# Allegro board PMOD2BNCSIMPLE_v1_02.brd
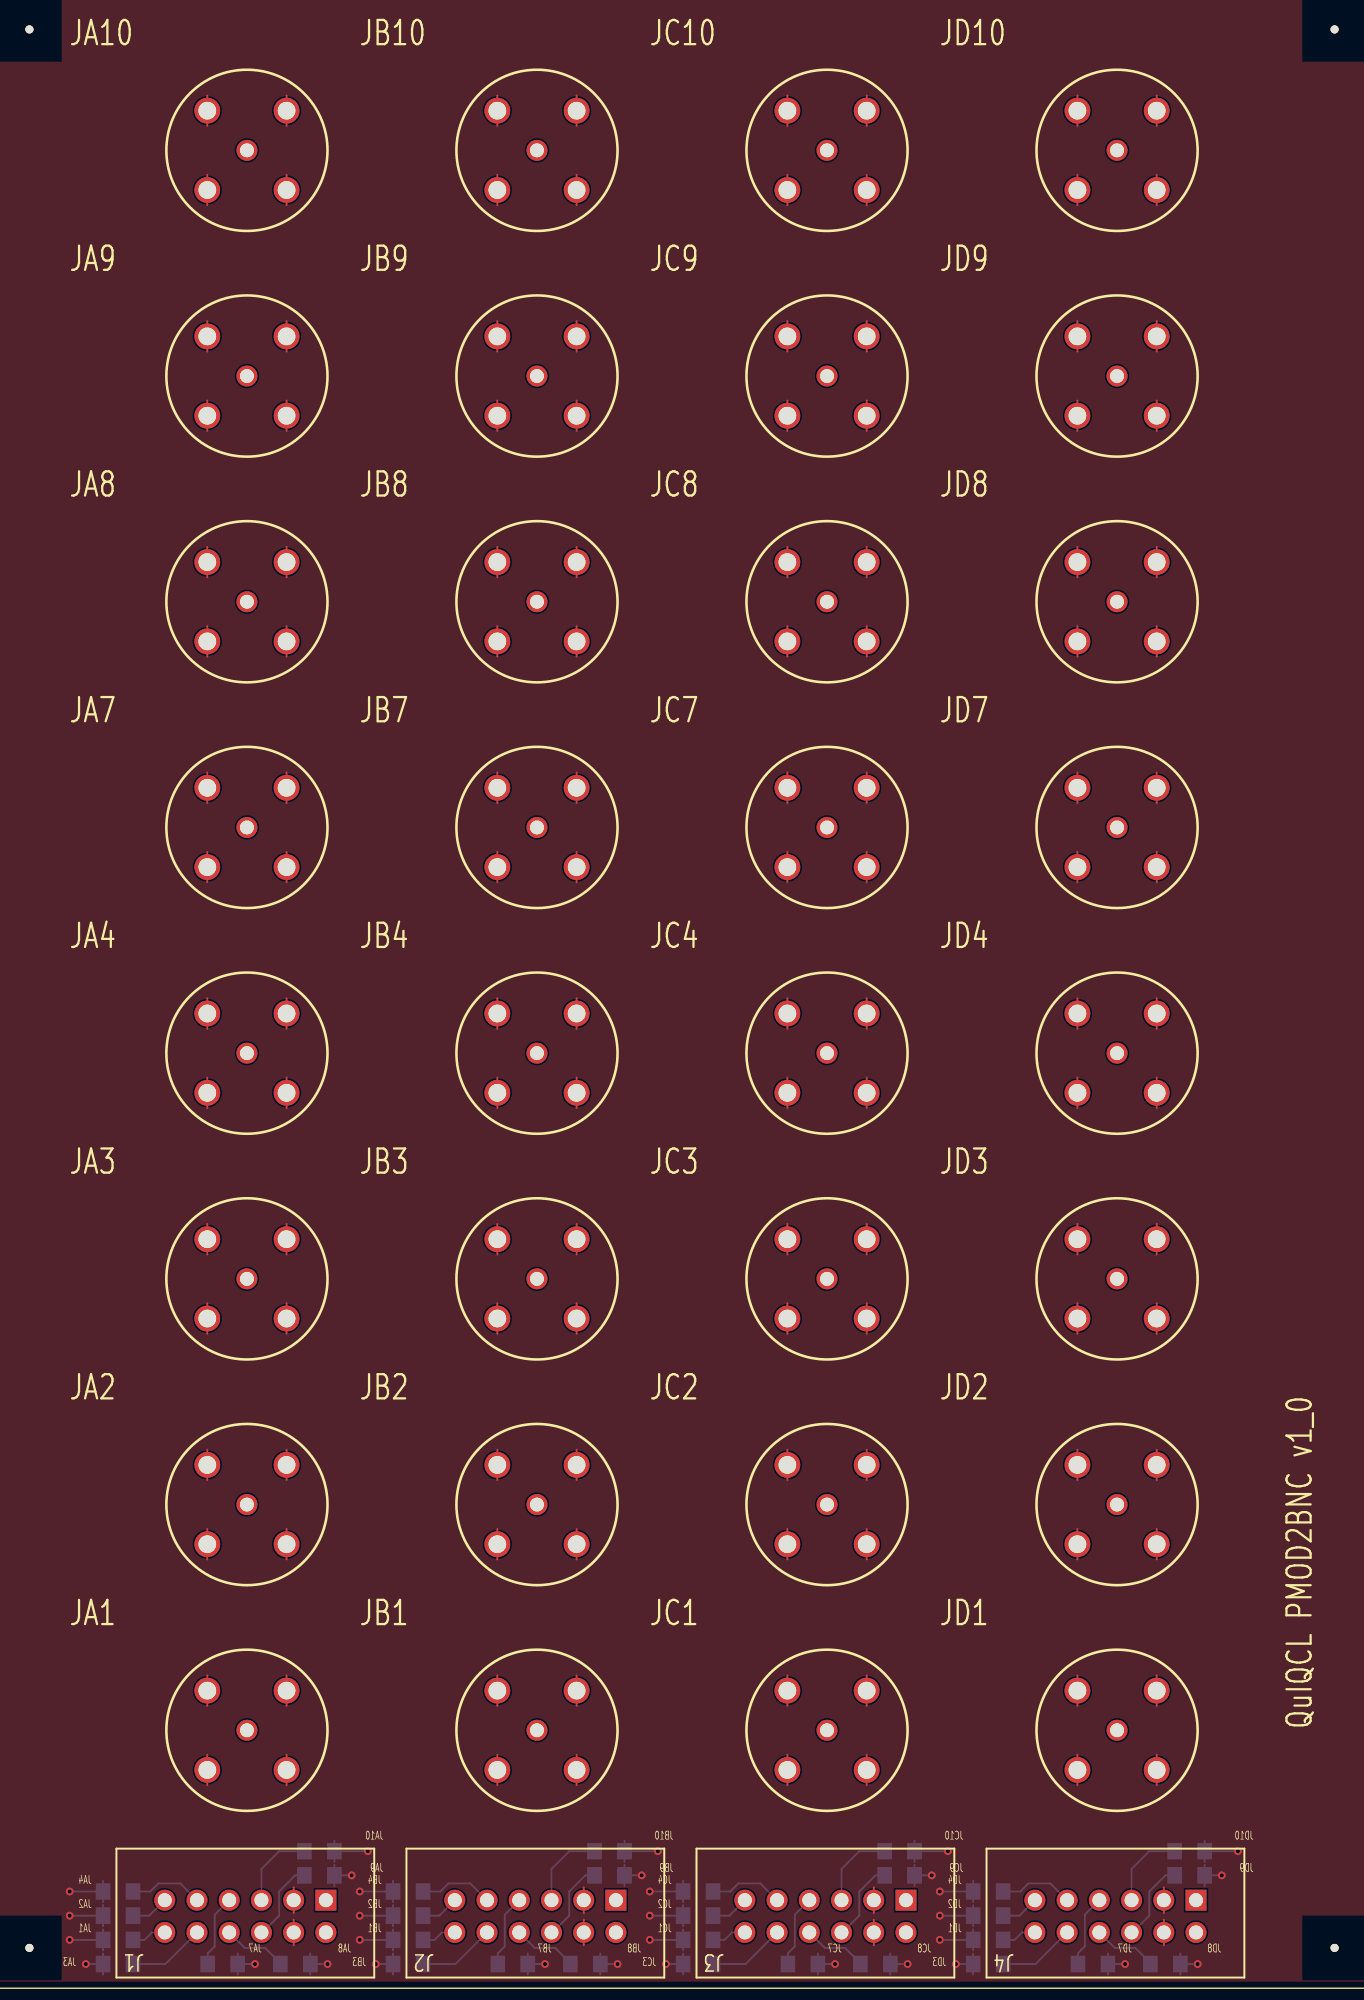
[diagram p0: board, top side]
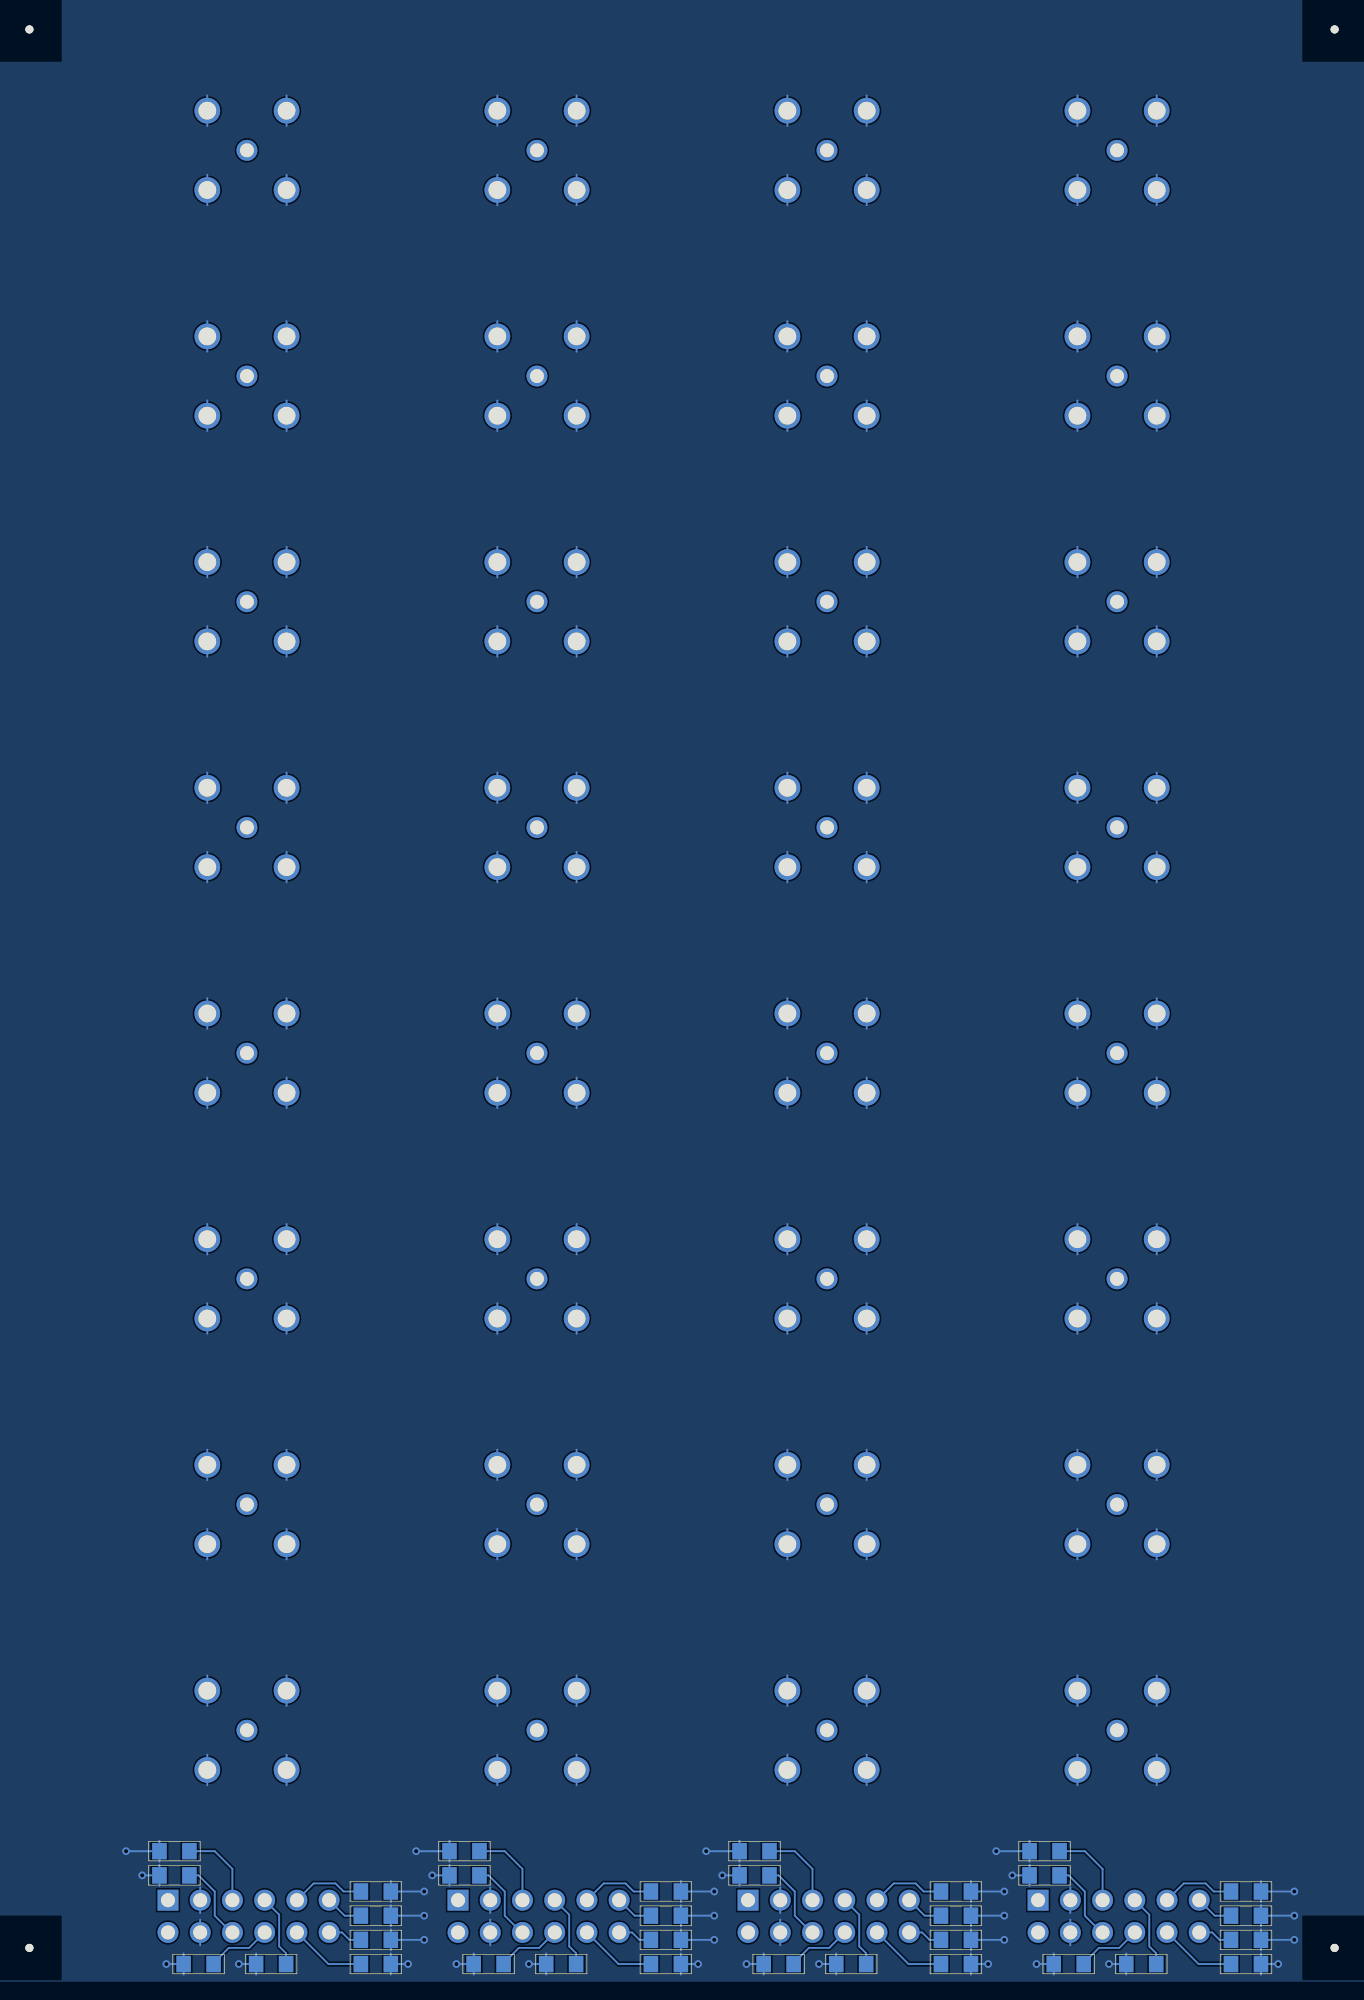
[diagram p1: board, bottom side, seen from below]

No outline. copper layers: TOP, SIGNAL, GND, BOTTOM. Coordinates in mm from the lowest, leftmost part position.

## Placement (name value [footprint] x y rotation side)
BNC1  -  [MP-13-22-1]  17.14 19.48 0 top
BNC2  -  [MP-13-22-1]  17.14 37.26 0 top
BNC3  -  [MP-13-22-1]  17.14 55.04 0 top
BNC4  -  [MP-13-22-1]  17.14 72.82 0 top
BNC5  -  [MP-13-22-1]  17.14 90.6 0 top
BNC6  -  [MP-13-22-1]  17.14 108.38 0 top
BNC7  -  [MP-13-22-1]  17.14 126.16 0 top
BNC8  -  [MP-13-22-1]  17.14 143.94 0 top
BNC9  -  [MP-13-22-1]  40.01 19.48 0 top
BNC10  -  [MP-13-22-1]  40.01 37.26 0 top
BNC11  -  [MP-13-22-1]  40.01 55.04 0 top
BNC12  -  [MP-13-22-1]  40.01 72.82 0 top
BNC13  -  [MP-13-22-1]  40.01 90.6 0 top
BNC14  -  [MP-13-22-1]  40.01 108.38 0 top
BNC15  -  [MP-13-22-1]  40.01 126.16 0 top
BNC16  -  [MP-13-22-1]  40.01 143.94 0 top
BNC17  -  [MP-13-22-1]  62.87 19.48 0 top
BNC18  -  [MP-13-22-1]  62.87 37.26 0 top
BNC19  -  [MP-13-22-1]  62.87 55.04 0 top
BNC20  -  [MP-13-22-1]  62.87 72.82 0 top
BNC21  -  [MP-13-22-1]  62.87 90.6 0 top
BNC22  -  [MP-13-22-1]  62.87 108.38 0 top
BNC23  -  [MP-13-22-1]  62.87 126.16 0 top
BNC24  -  [MP-13-22-1]  62.87 143.94 0 top
BNC25  -  [MP-13-22-1]  85.73 19.48 0 top
BNC26  -  [MP-13-22-1]  85.73 37.26 0 top
BNC27  -  [MP-13-22-1]  85.73 55.04 0 top
BNC28  -  [MP-13-22-1]  85.73 72.82 0 top
BNC29  -  [MP-13-22-1]  85.73 90.6 0 top
BNC30  -  [MP-13-22-1]  85.73 108.38 0 top
BNC31  -  [MP-13-22-1]  85.73 126.16 0 top
BNC32  -  [MP-13-22-1]  85.73 143.94 0 top
J1  71764_0114  [717640112]  6.86 0 180 top
J2  71764_0114  [717640112]  29.72 0 180 top
J3  71764_0114  [717640112]  52.58 0 180 top
J4  71764_0114  [717640112]  75.44 0 180 top
NOREF  -  [unnamed]  0 2.34 0 top
NOREF#2  -  [unnamed]  0 153.47 0 top
NOREF#3  -  [unnamed]  102.87 153.47 0 top
NOREF#4  -  [unnamed]  102.87 2.34 0 top
R1  -  [RES_0805]  6.99 2.97 180 bottom
R2  -  [RES_0805]  6.99 4.88 180 bottom
R3  -  [RES_0805]  6.99 1.07 180 bottom
R4  -  [RES_0805]  6.99 6.78 180 bottom
R5  -  [RES_0805]  15.24 1.07 0 bottom
R6  -  [RES_0805]  20.95 1.07 0 bottom
R7  -  [RES_0805]  22.86 8.05 0 bottom
R8  -  [RES_0805]  22.86 9.96 0 bottom
R9  -  [RES_0805]  29.85 2.97 180 bottom
R10  -  [RES_0805]  29.85 4.88 180 bottom
R11  -  [RES_0805]  29.85 1.07 180 bottom
R12  -  [RES_0805]  29.85 6.78 180 bottom
R13  -  [RES_0805]  38.1 1.07 0 bottom
R14  -  [RES_0805]  43.82 1.07 0 bottom
R15  -  [RES_0805]  45.72 8.05 0 bottom
R16  -  [RES_0805]  45.72 9.96 0 bottom
R17  -  [RES_0805]  52.71 2.97 180 bottom
R18  -  [RES_0805]  52.71 4.88 180 bottom
R19  -  [RES_0805]  52.71 1.07 180 bottom
R20  -  [RES_0805]  52.71 6.78 180 bottom
R21  -  [RES_0805]  60.96 1.07 0 bottom
R22  -  [RES_0805]  66.67 1.07 0 bottom
R23  -  [RES_0805]  68.58 8.05 0 bottom
R24  -  [RES_0805]  68.58 9.96 0 bottom
R25  -  [RES_0805]  75.56 2.97 180 bottom
R26  -  [RES_0805]  75.56 4.88 180 bottom
R27  -  [RES_0805]  75.56 1.07 180 bottom
R28  -  [RES_0805]  75.56 6.78 180 bottom
R29  -  [RES_0805]  83.82 1.07 0 bottom
R30  -  [RES_0805]  89.53 1.07 0 bottom
R31  -  [RES_0805]  91.44 8.05 0 bottom
R32  -  [RES_0805]  91.44 9.96 0 bottom

## Library data of the parts
BNC1-BNC32 = MP-13-22-1
J1-J4 = 71764_0114
R1-R32 = RES_0805

## Footprints (pads in the part's own frame, mm; a bottom-side part is the same pattern mirrored in y, then rotated)
717640112
  rect 1.651x1.651 hole 1.1: 1(-16.51,-6.096)
  round 1.651 hole 1.1: 2(-16.51,-3.556) 3(-13.97,-6.096) 4(-13.97,-3.556) 5(-11.43,-6.096) 6(-11.43,-3.556) 7(-8.89,-6.096) 8(-8.89,-3.556) 9(-6.35,-6.096) 10(-6.35,-3.556) 11(-3.81,-6.096) 12(-3.81,-3.556)
MP-13-22-1
  round 2.032 hole 1.397: 1(3.124,3.124) 2(3.124,-3.124) 3(-3.124,-3.124) 4(-3.124,3.124)
  round 1.651 hole 1.092: 5(0,0)
RES_0805
  rect 1.151x1.3 smd: 1(1.181,0) 2(-1.181,0)
unnamed
  round 0.635 hole 3.175 unplated: (0,0)

## Nets
GND: BNC1.1(GND1) BNC1.2(GND2) BNC1.3(GND3) BNC1.4(GND4) BNC2.1(GND1) BNC2.2(GND2) BNC2.3(GND3) BNC2.4(GND4) BNC3.1(GND1) BNC3.2(GND2) BNC3.3(GND3) BNC3.4(GND4) BNC4.1(GND1) BNC4.2(GND2) BNC4.3(GND3) BNC4.4(GND4) BNC5.1(GND1) BNC5.2(GND2) BNC5.3(GND3) BNC5.4(GND4) BNC6.1(GND1) BNC6.2(GND2) BNC6.3(GND3) BNC6.4(GND4) BNC7.1(GND1) BNC7.2(GND2) BNC7.3(GND3) BNC7.4(GND4) BNC8.1(GND1) BNC8.2(GND2) BNC8.3(GND3) BNC8.4(GND4) BNC9.1(GND1) BNC9.2(GND2) BNC9.3(GND3) BNC9.4(GND4) BNC10.1(GND1) BNC10.2(GND2) BNC10.3(GND3) BNC10.4(GND4) BNC11.1(GND1) BNC11.2(GND2) BNC11.3(GND3) BNC11.4(GND4) BNC12.1(GND1) BNC12.2(GND2) BNC12.3(GND3) BNC12.4(GND4) BNC13.1(GND1) BNC13.2(GND2) BNC13.3(GND3) BNC13.4(GND4) BNC14.1(GND1) BNC14.2(GND2) BNC14.3(GND3) BNC14.4(GND4) BNC15.1(GND1) BNC15.2(GND2) BNC15.3(GND3) BNC15.4(GND4) BNC16.1(GND1) BNC16.2(GND2) BNC16.3(GND3) BNC16.4(GND4) BNC17.1(GND1) BNC17.2(GND2) BNC17.3(GND3) BNC17.4(GND4) BNC18.1(GND1) BNC18.2(GND2) BNC18.3(GND3) BNC18.4(GND4) BNC19.1(GND1) BNC19.2(GND2) BNC19.3(GND3) BNC19.4(GND4) BNC20.1(GND1) BNC20.2(GND2) BNC20.3(GND3) BNC20.4(GND4) BNC21.1(GND1) BNC21.2(GND2) BNC21.3(GND3) BNC21.4(GND4) BNC22.1(GND1) BNC22.2(GND2) BNC22.3(GND3) BNC22.4(GND4) BNC23.1(GND1) BNC23.2(GND2) BNC23.3(GND3) BNC23.4(GND4) BNC24.1(GND1) BNC24.2(GND2) BNC24.3(GND3) BNC24.4(GND4) BNC25.1(GND1) BNC25.2(GND2) BNC25.3(GND3) BNC25.4(GND4) BNC26.1(GND1) BNC26.2(GND2) BNC26.3(GND3) BNC26.4(GND4) BNC27.1(GND1) BNC27.2(GND2) BNC27.3(GND3) BNC27.4(GND4) BNC28.1(GND1) BNC28.2(GND2) BNC28.3(GND3) BNC28.4(GND4) BNC29.1(GND1) BNC29.2(GND2) BNC29.3(GND3) BNC29.4(GND4) BNC30.1(GND1) BNC30.2(GND2) BNC30.3(GND3) BNC30.4(GND4) BNC31.1(GND1) BNC31.2(GND2) BNC31.3(GND3) BNC31.4(GND4) BNC32.1(GND1) BNC32.2(GND2) BNC32.3(GND3) BNC32.4(GND4) J1.3 J1.4 J2.3 J2.4 J3.3 J3.4 J4.3 J4.4 R1.1 R2.1 R3.1 R4.1 R5.1 R6.1 R7.1 R8.1 R9.1 R10.1 R11.1 R12.1 R13.1 R14.1 R15.1 R16.1 R17.1 R18.1 R19.1 R20.1 R21.1 R22.1 R23.1 R24.1 R25.1 R26.1 R27.1 R28.1 R29.1 R30.1 R31.1 R32.1
N08480: BNC1.5(IO) J1.12 R1.2
N08489: BNC2.5(IO) J1.10 R3.2
N08507: BNC3.5(IO) J1.7 R5.2
N08519: BNC4.5(IO) J1.6 R7.2
N08544: BNC5.5(IO) J1.11 R2.2
N08556: BNC6.5(IO) J1.9 R4.2
N08588: BNC7.5(IO) J1.8 R6.2
N08600: BNC8.5(IO) J1.5 R8.2
N13592: BNC9.5(IO) J2.12 R9.2
N13596: BNC10.5(IO) J2.10 R11.2
N13604: BNC11.5(IO) J2.7 R13.2
N13610: BNC12.5(IO) J2.6 R15.2
N13620: BNC13.5(IO) J2.11 R10.2
N13626: BNC14.5(IO) J2.9 R12.2
N13636: BNC15.5(IO) J2.8 R14.2
N13642: BNC16.5(IO) J2.5 R16.2
N14473: BNC17.5(IO) J3.12 R17.2
N14477: BNC18.5(IO) J3.10 R19.2
N14485: BNC19.5(IO) J3.7 R21.2
N14491: BNC20.5(IO) J3.6 R23.2
N14501: BNC21.5(IO) J3.11 R18.2
N14507: BNC22.5(IO) J3.9 R20.2
N14517: BNC23.5(IO) J3.8 R22.2
N14523: BNC24.5(IO) J3.5 R24.2
N15354: BNC25.5(IO) J4.12 R25.2
N15358: BNC26.5(IO) J4.10 R27.2
N15366: BNC27.5(IO) J4.7 R29.2
N15372: BNC28.5(IO) J4.6 R31.2
N15382: BNC29.5(IO) J4.11 R26.2
N15388: BNC30.5(IO) J4.9 R28.2
N15398: BNC31.5(IO) J4.8 R30.2
N15404: BNC32.5(IO) J4.5 R32.2

Pads without a net: J1 1 2; J2 1 2; J3 1 2; J4 1 2

## Via types
v1: diameter 0.61, hole 0.33, TOP to BOTTOM, 32 vias

## Routing (per net, layer and track width the routed paths; a pad name or vN(x,y) marks a point on that pad's centre or on a via; arc(x,y) is an arc through that point)
GND: length 1409.3
  TOP w0.127: 14.02,92.53 BNC5.4 14.02,94.92 ; 20.83,5.09 J1.3 20.83,7.1 ; 36.88,17.56 BNC9.3 36.88,15.16 ; 36.88,92.53 BNC13.4 36.88,94.92 ; 43.13,130.48 BNC15.1 43.13,128.09 ; 88.85,74.75 BNC28.1 88.85,77.14 ; 36.88,39.19 BNC10.4 36.88,41.58 ; 14.02,21.41 BNC1.4 14.02,23.8 ; 14.02,104.06 BNC6.3 14.02,106.46 ; 20.27,139.62 BNC8.2 20.27,142.02 ; 89.41,4.56 J4.4 89.41,2.55 ; 88.85,32.94 BNC26.2 88.85,35.34 ; 36.88,23.8 BNC9.4 36.88,21.41 ; 65.99,88.68 BNC21.2 65.99,86.28 ; 59.74,124.24 BNC23.3 59.74,121.84 ; 43.13,77.14 BNC12.1 43.13,74.75 ; 43.13,21.41 BNC9.1 43.13,23.8 ; 20.27,70.9 BNC4.2 20.27,68.5 ; 36.88,50.72 BNC11.3 36.88,53.12 ; 66.55,2.55 J3.4 66.55,4.56 ; 14.02,148.26 BNC8.4 14.02,145.87 ; 65.99,92.53 BNC21.1 65.99,94.92 ; 88.85,94.92 BNC29.1 88.85,92.53 ; 14.02,50.72 BNC3.3 14.02,53.12 ; 14.02,68.5 BNC4.3 14.02,70.9 ; 20.27,112.7 BNC6.1 20.27,110.31 ; 59.74,70.9 BNC20.3 59.74,68.5 ; 65.99,128.09 BNC23.1 65.99,130.48 ; 20.27,106.46 BNC6.2 20.27,104.06 ; 20.27,145.87 BNC8.1 20.27,148.26 ; 59.74,148.26 BNC24.4 59.74,145.87 ; 82.6,145.87 BNC32.4 82.6,148.26 ; 36.88,86.28 BNC13.3 36.88,88.68 ; 43.13,145.87 BNC16.1 43.13,148.26 ; 88.85,70.9 BNC28.2 88.85,68.5 ; 20.27,121.84 BNC7.2 20.27,124.24 ; 14.02,130.48 BNC7.4 14.02,128.09 ; 82.6,112.7 BNC30.4 82.6,110.31 ; 20.27,17.56 BNC1.2 20.27,15.16 ; 14.02,88.68 BNC5.3 14.02,86.28 ; 36.88,104.06 BNC14.3 36.88,106.46 ; 14.02,15.16 BNC1.3 14.02,17.56 ; 88.85,56.97 BNC27.1 88.85,59.36 ; 43.13,50.72 BNC11.2 43.13,53.12 ; 36.88,139.62 BNC16.3 36.88,142.02 ; 20.27,21.41 BNC1.1 20.27,23.8 ; 14.02,35.34 BNC2.3 14.02,32.94 ; 65.99,53.12 BNC19.2 65.99,50.72 ; 59.74,35.34 BNC18.3 59.74,32.94 ; 82.6,104.06 BNC30.3 82.6,106.46 ; 89.41,5.09 J4.3 89.41,7.1 ; 82.6,88.68 BNC29.3 82.6,86.28 ; 65.99,121.84 BNC23.2 65.99,124.24 ; 36.88,110.31 BNC14.4 36.88,112.7 ; 59.74,50.72 BNC19.3 59.74,53.12 ; 59.74,104.06 BNC22.3 59.74,106.46 ; 14.02,142.02 BNC8.3 14.02,139.62 ; 43.69,2.55 J2.4 43.69,4.56 ; 36.88,77.14 BNC12.4 36.88,74.75 ; 43.69,7.1 J2.3 43.69,5.09 ; 20.27,94.92 BNC5.1 20.27,92.53 ; 82.6,70.9 BNC28.3 82.6,68.5 ; 36.88,124.24 BNC15.3 36.88,121.84 ; 43.13,112.7 BNC14.1 43.13,110.31 ; 88.85,139.62 BNC32.2 88.85,142.02 ; 65.99,23.8 BNC17.1 65.99,21.41 ; 59.74,142.02 BNC24.3 59.74,139.62 ; 88.85,17.56 BNC25.2 88.85,15.16 ; 65.99,74.75 BNC20.1 65.99,77.14 ; 43.13,86.28 BNC13.2 43.13,88.68 ; 14.02,74.75 BNC4.4 14.02,77.14 ; 36.88,130.48 BNC15.4 36.88,128.09 ; 59.74,77.14 BNC20.4 59.74,74.75 ; 43.13,121.84 BNC15.2 43.13,124.24 ; 20.27,88.68 BNC5.2 20.27,86.28 ; 36.88,59.36 BNC11.4 36.88,56.97 ; 65.99,39.19 BNC18.1 65.99,41.58 ; 14.02,112.7 BNC6.4 14.02,110.31 ; 88.85,23.8 BNC25.1 88.85,21.41 ; 82.6,142.02 BNC32.3 82.6,139.62 ; 20.27,32.94 BNC2.2 20.27,35.34 ; 20.27,56.97 BNC3.1 20.27,59.36 ; 43.13,32.94 BNC10.2 43.13,35.34 ; 43.13,17.56 BNC9.2 43.13,15.16 ; 82.6,128.09 BNC31.4 82.6,130.48 ; 82.6,121.84 BNC31.3 82.6,124.24 ; 59.74,112.7 BNC22.4 59.74,110.31 ; 20.27,39.19 BNC2.1 20.27,41.58 ; 88.85,145.87 BNC32.1 88.85,148.26 ; 14.02,121.84 BNC7.3 14.02,124.24 ; 59.74,59.36 BNC19.4 59.74,56.97 ; 82.6,53.12 BNC27.3 82.6,50.72 ; 88.85,106.46 BNC30.2 88.85,104.06 ; 14.02,56.97 BNC3.4 14.02,59.36 ; 82.6,15.16 BNC25.3 82.6,17.56 ; 88.85,124.24 BNC31.2 88.85,121.84 ; 88.85,50.72 BNC27.2 88.85,53.12 ; 88.85,41.58 BNC26.1 88.85,39.19 ; 36.88,148.26 BNC16.4 36.88,145.87 ; 43.13,70.9 BNC12.2 43.13,68.5 ; 59.74,41.58 BNC18.4 59.74,39.19 ; 82.6,39.19 BNC26.4 82.6,41.58 ; 59.74,15.16 BNC17.3 59.74,17.56 ; 65.99,148.26 BNC24.1 65.99,145.87 ; 65.99,35.34 BNC18.2 65.99,32.94 ; 59.74,92.53 BNC21.4 59.74,94.92 ; 20.27,53.12 BNC3.2 20.27,50.72 ; 65.99,110.31 BNC22.1 65.99,112.7 ; 14.02,39.19 BNC2.4 14.02,41.58 ; 43.13,142.02 BNC16.2 43.13,139.62 ; 20.27,128.09 BNC7.1 20.27,130.48 ; 65.99,139.62 BNC24.2 65.99,142.02 ; 65.99,70.9 BNC20.2 65.99,68.5 ; 82.6,35.34 BNC26.3 82.6,32.94 ; 43.13,59.36 BNC11.1 43.13,56.97 ; 65.99,106.46 BNC22.2 65.99,104.06 ; 82.6,21.41 BNC25.4 82.6,23.8 ; 36.88,70.9 BNC12.3 36.88,68.5 ; 43.13,41.58 BNC10.1 43.13,39.19 ; 43.13,94.92 BNC13.1 43.13,92.53 ; 88.85,130.48 BNC31.1 88.85,128.09 ; 20.83,4.56 J1.4 20.83,2.55 ; 82.6,74.75 BNC28.4 82.6,77.14 ; 20.27,74.75 BNC4.1 20.27,77.14 ; 88.85,112.7 BNC30.1 88.85,110.31 ; 59.74,86.28 BNC21.3 59.74,88.68 ; 65.99,56.97 BNC19.1 65.99,59.36 ; 43.13,104.06 BNC14.2 43.13,106.46 ; 82.6,92.53 BNC29.4 82.6,94.92 ; 65.99,17.56 BNC17.2 65.99,15.16 ; 66.55,7.1 J3.3 66.55,5.09 ; 82.6,59.36 BNC27.4 82.6,56.97 ; 59.74,23.8 BNC17.4 59.74,21.41 ; 36.88,32.94 BNC10.3 36.88,35.34 ; 59.74,130.48 BNC23.4 59.74,128.09 ; 88.85,86.28 BNC29.2 88.85,88.68
  SIGNAL w0.112: 36.88,104.06 BNC14.3 36.88,106.46 ; 82.6,41.58 BNC26.4 82.6,39.19 ; 82.6,124.24 BNC31.3 82.6,121.84 ; 59.74,56.97 BNC19.4 59.74,59.36 ; 20.27,53.12 BNC3.2 20.27,50.72 ; 20.27,106.46 BNC6.2 20.27,104.06 ; 65.99,112.7 BNC22.1 65.99,110.31 ; 59.74,23.8 BNC17.4 59.74,21.41 ; 14.02,130.48 BNC7.4 14.02,128.09 ; 14.02,15.16 BNC1.3 14.02,17.56 ; 82.6,74.75 BNC28.4 82.6,77.14 ; 36.88,70.9 BNC12.3 36.88,68.5 ; 14.02,23.8 BNC1.4 14.02,21.41 ; 66.55,4.56 J3.4 66.55,2.55 ; 88.85,86.28 BNC29.2 88.85,88.68 ; 14.02,39.19 BNC2.4 14.02,41.58 ; 59.74,77.14 BNC20.4 59.74,74.75 ; 14.02,50.72 BNC3.3 14.02,53.12 ; 88.85,145.87 BNC32.1 88.85,148.26 ; 43.13,39.19 BNC10.1 43.13,41.58 ; 43.13,110.31 BNC14.1 43.13,112.7 ; 20.27,128.09 BNC7.1 20.27,130.48 ; 36.88,74.75 BNC12.4 36.88,77.14 ; 14.02,139.62 BNC8.3 14.02,142.02 ; 82.6,94.92 BNC29.4 82.6,92.53 ; 66.55,7.1 J3.3 66.55,5.09 ; 59.74,86.28 BNC21.3 59.74,88.68 ; 43.13,94.92 BNC13.1 43.13,92.53 ; 82.6,106.46 BNC30.3 82.6,104.06 ; 36.88,50.72 BNC11.3 36.88,53.12 ; 88.85,23.8 BNC25.1 88.85,21.41 ; 88.85,124.24 BNC31.2 88.85,121.84 ; 65.99,23.8 BNC17.1 65.99,21.41 ; 36.88,112.7 BNC14.4 36.88,110.31 ; 59.74,17.56 BNC17.3 59.74,15.16 ; 65.99,148.26 BNC24.1 65.99,145.87 ; 88.85,112.7 BNC30.1 88.85,110.31 ; 82.6,32.94 BNC26.3 82.6,35.34 ; 36.88,124.24 BNC15.3 36.88,121.84 ; 14.02,32.94 BNC2.3 14.02,35.34 ; 43.13,15.16 BNC9.2 43.13,17.56 ; 43.13,77.14 BNC12.1 43.13,74.75 ; 65.99,124.24 BNC23.2 65.99,121.84 ; 20.27,110.31 BNC6.1 20.27,112.7 ; 88.85,104.06 BNC30.2 88.85,106.46 ; 88.85,53.12 BNC27.2 88.85,50.72 ; 59.74,142.02 BNC24.3 59.74,139.62 ; 43.13,130.48 BNC15.1 43.13,128.09 ; 65.99,50.72 BNC19.2 65.99,53.12 ; 82.6,112.7 BNC30.4 82.6,110.31 ; 20.27,77.14 BNC4.1 20.27,74.75 ; 65.99,74.75 BNC20.1 65.99,77.14 ; 43.13,50.72 BNC11.2 43.13,53.12 ; 82.6,70.9 BNC28.3 82.6,68.5 ; 14.02,77.14 BNC4.4 14.02,74.75 ; 65.99,56.97 BNC19.1 65.99,59.36 ; 43.69,4.56 J2.4 43.69,2.55 ; 36.88,39.19 BNC10.4 36.88,41.58 ; 20.27,32.94 BNC2.2 20.27,35.34 ; 36.88,15.16 BNC9.3 36.88,17.56 ; 20.27,15.16 BNC1.2 20.27,17.56 ; 82.6,148.26 BNC32.4 82.6,145.87 ; 14.02,59.36 BNC3.4 14.02,56.97 ; 36.88,142.02 BNC16.3 36.88,139.62 ; 14.02,148.26 BNC8.4 14.02,145.87 ; 36.88,32.94 BNC10.3 36.88,35.34 ; 43.13,86.28 BNC13.2 43.13,88.68 ; 59.74,35.34 BNC18.3 59.74,32.94 ; 43.13,139.62 BNC16.2 43.13,142.02 ; 65.99,142.02 BNC24.2 65.99,139.62 ; 43.69,5.09 J2.3 43.69,7.1 ; 89.41,2.55 J4.4 89.41,4.56 ; 43.13,145.87 BNC16.1 43.13,148.26 ; 59.74,121.84 BNC23.3 59.74,124.24 ; 14.02,106.46 BNC6.3 14.02,104.06 ; 82.6,59.36 BNC27.4 82.6,56.97 ; 82.6,15.16 BNC25.3 82.6,17.56 ; 43.13,121.84 BNC15.2 43.13,124.24 ; 88.85,56.97 BNC27.1 88.85,59.36 ; 82.6,86.28 BNC29.3 82.6,88.68 ; 65.99,104.06 BNC22.2 65.99,106.46 ; 20.27,59.36 BNC3.1 20.27,56.97 ; 20.83,7.1 J1.3 20.83,5.09 ; 82.6,139.62 BNC32.3 82.6,142.02 ; 36.88,92.53 BNC13.4 36.88,94.92 ; 88.85,139.62 BNC32.2 88.85,142.02 ; 65.99,70.9 BNC20.2 65.99,68.5 ; 82.6,23.8 BNC25.4 82.6,21.41 ; 88.85,15.16 BNC25.2 88.85,17.56 ; 59.74,112.7 BNC22.4 59.74,110.31 ; 14.02,88.68 BNC5.3 14.02,86.28 ; 65.99,35.34 BNC18.2 65.99,32.94 ; 20.27,145.87 BNC8.1 20.27,148.26 ; 20.83,2.55 J1.4 20.83,4.56 ; 20.27,23.8 BNC1.1 20.27,21.41 ; 89.41,5.09 J4.3 89.41,7.1 ; 65.99,94.92 BNC21.1 65.99,92.53 ; 59.74,50.72 BNC19.3 59.74,53.12 ; 65.99,41.58 BNC18.1 65.99,39.19 ; 43.13,59.36 BNC11.1 43.13,56.97 ; 36.88,145.87 BNC16.4 36.88,148.26 ; 59.74,145.87 BNC24.4 59.74,148.26 ; 88.85,77.14 BNC28.1 88.85,74.75 ; 65.99,15.16 BNC17.2 65.99,17.56 ; 20.27,70.9 BNC4.2 20.27,68.5 ; 88.85,39.19 BNC26.1 88.85,41.58 ; 14.02,110.31 BNC6.4 14.02,112.7 ; 14.02,121.84 BNC7.3 14.02,124.24 ; 59.74,106.46 BNC22.3 59.74,104.06 ; 36.88,59.36 BNC11.4 36.88,56.97 ; 88.85,130.48 BNC31.1 88.85,128.09 ; 20.27,86.28 BNC5.2 20.27,88.68 ; 88.85,70.9 BNC28.2 88.85,68.5 ; 20.27,121.84 BNC7.2 20.27,124.24 ; 59.74,94.92 BNC21.4 59.74,92.53 ; 14.02,70.9 BNC4.3 14.02,68.5 ; 43.13,32.94 BNC10.2 43.13,35.34 ; 65.99,86.28 BNC21.2 65.99,88.68 ; 43.13,23.8 BNC9.1 43.13,21.41 ; 65.99,130.48 BNC23.1 65.99,128.09 ; 82.6,53.12 BNC27.3 82.6,50.72 ; 20.27,41.58 BNC2.1 20.27,39.19 ; 20.27,94.92 BNC5.1 20.27,92.53 ; 88.85,35.34 BNC26.2 88.85,32.94 ; 36.88,128.09 BNC15.4 36.88,130.48 ; 36.88,86.28 BNC13.3 36.88,88.68 ; 59.74,39.19 BNC18.4 59.74,41.58 ; 59.74,130.48 BNC23.4 59.74,128.09 ; 88.85,92.53 BNC29.1 88.85,94.92 ; 43.13,106.46 BNC14.2 43.13,104.06 ; 82.6,128.09 BNC31.4 82.6,130.48 ; 59.74,68.5 BNC20.3 59.74,70.9 ; 43.13,70.9 BNC12.2 43.13,68.5 ; 14.02,92.53 BNC5.4 14.02,94.92 ; 36.88,21.41 BNC9.4 36.88,23.8 ; 20.27,142.02 BNC8.2 20.27,139.62
  GND w0.127: 36.88,21.41 BNC9.4 36.88,23.8 ; 82.6,148.26 BNC32.4 82.6,145.87 ; 14.02,110.31 BNC6.4 14.02,112.7 ; 88.85,50.72 BNC27.2 88.85,53.12 ; 20.27,88.68 BNC5.2 20.27,86.28 ; 20.27,15.16 BNC1.2 20.27,17.56 ; 59.74,50.72 BNC19.3 59.74,53.12 ; 88.85,32.94 BNC26.2 88.85,35.34 ; 59.74,88.68 BNC21.3 59.74,86.28 ; 43.13,121.84 BNC15.2 43.13,124.24 ; 88.85,94.92 BNC29.1 88.85,92.53 ; 65.99,104.06 BNC22.2 65.99,106.46 ; 20.27,56.97 BNC3.1 20.27,59.36 ; 14.02,21.41 BNC1.4 14.02,23.8 ; 65.99,15.16 BNC17.2 65.99,17.56 ; 36.88,142.02 BNC16.3 36.88,139.62 ; 59.74,77.14 BNC20.4 59.74,74.75 ; 14.02,59.36 BNC3.4 14.02,56.97 ; 59.74,39.19 BNC18.4 59.74,41.58 ; 66.55,2.55 J3.4 66.55,4.56 ; 43.69,2.55 J2.4 43.69,4.56 ; 82.6,50.72 BNC27.3 82.6,53.12 ; 65.99,139.62 BNC24.2 65.99,142.02 ; 59.74,121.84 BNC23.3 59.74,124.24 ; 65.99,128.09 BNC23.1 65.99,130.48 ; 65.99,124.24 BNC23.2 65.99,121.84 ; 89.41,2.55 J4.4 89.41,4.56 ; 88.85,59.36 BNC27.1 88.85,56.97 ; 88.85,41.58 BNC26.1 88.85,39.19 ; 14.02,53.12 BNC3.3 14.02,50.72 ; 43.13,77.14 BNC12.1 43.13,74.75 ; 43.13,112.7 BNC14.1 43.13,110.31 ; 43.13,148.26 BNC16.1 43.13,145.87 ; 66.55,7.1 J3.3 66.55,5.09 ; 82.6,121.84 BNC31.3 82.6,124.24 ; 36.88,53.12 BNC11.3 36.88,50.72 ; 43.13,53.12 BNC11.2 43.13,50.72 ; 88.85,130.48 BNC31.1 88.85,128.09 ; 82.6,23.8 BNC25.4 82.6,21.41 ; 65.99,39.19 BNC18.1 65.99,41.58 ; 36.88,68.5 BNC12.3 36.88,70.9 ; 20.27,21.41 BNC1.1 20.27,23.8 ; 59.74,128.09 BNC23.4 59.74,130.48 ; 14.02,41.58 BNC2.4 14.02,39.19 ; 65.99,92.53 BNC21.1 65.99,94.92 ; 36.88,124.24 BNC15.3 36.88,121.84 ; 82.6,112.7 BNC30.4 82.6,110.31 ; 82.6,142.02 BNC32.3 82.6,139.62 ; 36.88,112.7 BNC14.4 36.88,110.31 ; 88.85,124.24 BNC31.2 88.85,121.84 ; 20.27,39.19 BNC2.1 20.27,41.58 ; 88.85,148.26 BNC32.1 88.85,145.87 ; 88.85,104.06 BNC30.2 88.85,106.46 ; 14.02,17.56 BNC1.3 14.02,15.16 ; 89.41,5.09 J4.3 89.41,7.1 ; 20.27,53.12 BNC3.2 20.27,50.72 ; 59.74,106.46 BNC22.3 59.74,104.06 ; 20.27,70.9 BNC4.2 20.27,68.5 ; 43.13,104.06 BNC14.2 43.13,106.46 ; 36.88,59.36 BNC11.4 36.88,56.97 ; 82.6,94.92 BNC29.4 82.6,92.53 ; 14.02,128.09 BNC7.4 14.02,130.48 ; 14.02,104.06 BNC6.3 14.02,106.46 ; 65.99,32.94 BNC18.2 65.99,35.34 ; 20.27,35.34 BNC2.2 20.27,32.94 ; 36.88,32.94 BNC10.3 36.88,35.34 ; 36.88,15.16 BNC9.3 36.88,17.56 ; 65.99,77.14 BNC20.1 65.99,74.75 ; 20.27,92.53 BNC5.1 20.27,94.92 ; 65.99,148.26 BNC24.1 65.99,145.87 ; 65.99,21.41 BNC17.1 65.99,23.8 ; 14.02,35.34 BNC2.3 14.02,32.94 ; 20.83,4.56 J1.4 20.83,2.55 ; 43.69,7.1 J2.3 43.69,5.09 ; 14.02,86.28 BNC5.3 14.02,88.68 ; 36.88,128.09 BNC15.4 36.88,130.48 ; 88.85,86.28 BNC29.2 88.85,88.68 ; 43.13,17.56 BNC9.2 43.13,15.16 ; 82.6,88.68 BNC29.3 82.6,86.28 ; 43.13,86.28 BNC13.2 43.13,88.68 ; 82.6,74.75 BNC28.4 82.6,77.14 ; 88.85,112.7 BNC30.1 88.85,110.31 ; 20.27,142.02 BNC8.2 20.27,139.62 ; 88.85,142.02 BNC32.2 88.85,139.62 ; 20.27,112.7 BNC6.1 20.27,110.31 ; 88.85,15.16 BNC25.2 88.85,17.56 ; 65.99,59.36 BNC19.1 65.99,56.97 ; 59.74,15.16 BNC17.3 59.74,17.56 ; 88.85,74.75 BNC28.1 88.85,77.14 ; 59.74,142.02 BNC24.3 59.74,139.62 ; 82.6,41.58 BNC26.4 82.6,39.19 ; 36.88,145.87 BNC16.4 36.88,148.26 ; 43.13,139.62 BNC16.2 43.13,142.02 ; 43.13,41.58 BNC10.1 43.13,39.19 ; 43.13,130.48 BNC15.1 43.13,128.09 ; 82.6,70.9 BNC28.3 82.6,68.5 ; 20.27,124.24 BNC7.2 20.27,121.84 ; 20.27,148.26 BNC8.1 20.27,145.87 ; 82.6,130.48 BNC31.4 82.6,128.09 ; 14.02,145.87 BNC8.4 14.02,148.26 ; 82.6,17.56 BNC25.3 82.6,15.16 ; 82.6,59.36 BNC27.4 82.6,56.97 ; 43.13,21.41 BNC9.1 43.13,23.8 ; 65.99,68.5 BNC20.2 65.99,70.9 ; 36.88,39.19 BNC10.4 36.88,41.58 ; 14.02,139.62 BNC8.3 14.02,142.02 ; 36.88,104.06 BNC14.3 36.88,106.46 ; 36.88,92.53 BNC13.4 36.88,94.92 ; 65.99,88.68 BNC21.2 65.99,86.28 ; 14.02,74.75 BNC4.4 14.02,77.14 ; 43.13,59.36 BNC11.1 43.13,56.97 ; 43.13,35.34 BNC10.2 43.13,32.94 ; 36.88,74.75 BNC12.4 36.88,77.14 ; 59.74,94.92 BNC21.4 59.74,92.53 ; 20.27,104.06 BNC6.2 20.27,106.46 ; 88.85,70.9 BNC28.2 88.85,68.5 ; 20.27,130.48 BNC7.1 20.27,128.09 ; 14.02,68.5 BNC4.3 14.02,70.9 ; 59.74,70.9 BNC20.3 59.74,68.5 ; 88.85,23.8 BNC25.1 88.85,21.41 ; 65.99,53.12 BNC19.2 65.99,50.72 ; 82.6,104.06 BNC30.3 82.6,106.46 ; 82.6,32.94 BNC26.3 82.6,35.34 ; 36.88,86.28 BNC13.3 36.88,88.68 ; 59.74,21.41 BNC17.4 59.74,23.8 ; 65.99,110.31 BNC22.1 65.99,112.7 ; 20.83,7.1 J1.3 20.83,5.09 ; 59.74,32.94 BNC18.3 59.74,35.34 ; 14.02,121.84 BNC7.3 14.02,124.24 ; 14.02,94.92 BNC5.4 14.02,92.53 ; 43.13,92.53 BNC13.1 43.13,94.92 ; 59.74,148.26 BNC24.4 59.74,145.87 ; 59.74,56.97 BNC19.4 59.74,59.36 ; 20.27,74.75 BNC4.1 20.27,77.14 ; 43.13,68.5 BNC12.2 43.13,70.9 ; 59.74,110.31 BNC22.4 59.74,112.7
  BOTTOM w0.145: 65.99,39.19 BNC18.1 65.99,41.58 ; R26.1 74.38,5.71 ; R26.1 74.38,4.04 ; R26.1 v1(71.76,4.88) ; 88.85,106.46 BNC30.2 88.85,104.06 ; 36.88,92.53 BNC13.4 36.88,94.92 ; R24.1 v1(72.39,9.96) ; R24.1 69.76,10.79 ; R24.1 69.76,9.12 ; 59.74,21.41 BNC17.4 59.74,23.8 ; 14.02,77.14 BNC4.4 14.02,74.75 ; 89.41,4.56 J4.4 89.41,2.55 ; 74.38,1.07 v1(73.03,1.07) ; 74.38,1.07 74.38,1.9 ; 74.38,1.07 74.38,0.23 ; 43.13,86.28 BNC13.2 43.13,88.68 ; 82.6,53.12 BNC27.3 82.6,50.72 ; R15.1 v1(48.26,8.05) ; R15.1 46.9,8.88 ; R15.1 46.9,7.22 ; 88.85,124.24 BNC31.2 88.85,121.84 ; 59.74,145.87 BNC24.4 59.74,148.26 ; 43.13,142.02 BNC16.2 43.13,139.62 ; 82.6,41.58 BNC26.4 82.6,39.19 ; 20.27,86.28 BNC5.2 20.27,88.68 ; 14.02,70.9 BNC4.3 14.02,68.5 ; 88.85,92.53 BNC29.1 88.85,94.92 ; 82.6,130.48 BNC31.4 82.6,128.09 ; 88.85,59.36 BNC27.1 88.85,56.97 ; R1.1 v1(3.17,2.97) ; R1.1 5.8,3.8 ; R1.1 5.8,2.14 ; 20.83,7.1 J1.3 20.83,5.09 ; R7.1 24.04,8.88 ; R7.1 v1(25.4,8.05) ; R7.1 24.04,7.22 ; 20.27,56.97 BNC3.1 20.27,59.36 ; 43.13,35.34 BNC10.2 43.13,32.94 ; 43.69,7.1 J2.3 43.69,5.09 ; 36.88,128.09 BNC15.4 36.88,130.48 ; 82.6,17.56 BNC25.3 82.6,15.16 ; 20.27,23.8 BNC1.1 20.27,21.41 ; 20.83,2.55 J1.4 20.83,4.56 ; 59.74,41.58 BNC18.4 59.74,39.19 ; R8.1 v1(26.67,9.96) ; R8.1 24.04,9.12 ; R8.1 24.04,10.79 ; 65.99,128.09 BNC23.1 65.99,130.48 ; 51.52,1.07 v1(50.17,1.07) ; 51.52,1.07 51.52,1.9 ; 51.52,1.07 51.52,0.23 ; 82.6,110.31 BNC30.4 82.6,112.7 ; 88.85,74.75 BNC28.1 88.85,77.14 ; R16.1 v1(49.53,9.96) ; R16.1 46.9,9.12 ; R16.1 46.9,10.79 ; 82.6,104.06 BNC30.3 82.6,106.46 ; 14.02,32.94 BNC2.3 14.02,35.34 ; R17.1 51.52,3.8 ; R17.1 51.52,2.14 ; R17.1 v1(48.9,2.97) ; 65.99,74.75 BNC20.1 65.99,77.14 ; 14.02,41.58 BNC2.4 14.02,39.19 ; 5.8,5.95 R4.1 ; R4.1 v1(3.17,6.78) ; R4.1 5.8,7.61 ; 16.42,0.23 R5.1 ; R5.1 v1(17.78,1.07) ; R5.1 16.42,1.9 ; 43.13,148.26 BNC16.1 43.13,145.87 ; 59.74,124.24 BNC23.3 59.74,121.84 ; 82.6,94.92 BNC29.4 82.6,92.53 ; 36.88,74.75 BNC12.4 36.88,77.14 ; 51.52,5.95 R20.1 ; R20.1 51.52,7.61 ; R20.1 v1(48.9,6.78) ; 20.27,68.5 BNC4.2 20.27,70.9 ; 14.02,94.92 BNC5.4 14.02,92.53 ; 59.74,70.9 BNC20.3 59.74,68.5 ; 36.88,139.62 BNC16.3 36.88,142.02 ; 88.85,142.02 BNC32.2 88.85,139.62 ; 43.13,59.36 BNC11.1 43.13,56.97 ; 65.99,92.53 BNC21.1 65.99,94.92 ; 14.02,50.72 BNC3.3 14.02,53.12 ; R12.1 v1(26.04,6.78) ; R12.1 28.66,5.95 ; R12.1 28.66,7.61 ; 14.02,121.84 BNC7.3 14.02,124.24 ; R18.1 51.52,5.71 ; R18.1 51.52,4.04 ; R18.1 v1(48.9,4.88) ; 92.62,9.12 R32.1 ; R32.1 92.62,10.79 ; R32.1 v1(95.25,9.96) ; 59.74,32.94 BNC18.3 59.74,35.34 ; 43.13,23.8 BNC9.1 43.13,21.41 ; 20.27,139.62 BNC8.2 20.27,142.02 ; 88.85,148.26 BNC32.1 88.85,145.87 ; 59.74,15.16 BNC17.3 59.74,17.56 ; 66.55,2.55 J3.4 66.55,4.56 ; 88.85,86.28 BNC29.2 88.85,88.68 ; R22.1 v1(69.22,1.07) ; R22.1 67.86,0.23 ; R22.1 67.86,1.9 ; 43.13,15.16 BNC9.2 43.13,17.56 ; 82.6,145.87 BNC32.4 82.6,148.26 ; 82.6,70.9 BNC28.3 82.6,68.5 ; 14.02,130.48 BNC7.4 14.02,128.09 ; 5.8,4.04 R2.1 ; R2.1 v1(3.17,4.88) ; R2.1 5.8,5.71 ; 36.88,17.56 BNC9.3 36.88,15.16 ; 88.85,112.7 BNC30.1 88.85,110.31 ; 36.88,148.26 BNC16.4 36.88,145.87 ; 5.8,0.23 5.8,1.07 ; 5.8,1.07 5.8,1.9 ; 5.8,1.07 v1(4.45,1.07) ; R31.1 92.62,8.88 ; R31.1 v1(93.98,8.05) ; R31.1 92.62,7.22 ; 65.99,56.97 BNC19.1 65.99,59.36 ; R6.1 22.14,1.9 ; R6.1 22.14,0.23 ; R6.1 v1(23.5,1.07) ; R23.1 69.76,8.88 ; R23.1 v1(71.12,8.05) ; R23.1 69.76,7.22 ; 88.85,41.58 BNC26.1 88.85,39.19 ; 59.74,94.92 BNC21.4 59.74,92.53 ; 88.85,68.5 BNC28.2 88.85,70.9 ; 36.88,70.9 BNC12.3 36.88,68.5 ; 88.85,17.56 BNC25.2 88.85,15.16 ; R21.1 v1(63.5,1.07) ; R21.1 62.14,1.9 ; R21.1 62.14,0.23 ; 74.38,2.14 R25.1 ; R25.1 74.38,3.8 ; R25.1 v1(71.76,2.97) ; 14.02,21.41 BNC1.4 14.02,23.8 ; 20.27,41.58 BNC2.1 20.27,39.19 ; 36.88,112.7 BNC14.4 36.88,110.31 ; 14.02,112.7 BNC6.4 14.02,110.31 ; 65.99,23.8 BNC17.1 65.99,21.41 ; 59.74,106.46 BNC22.3 59.74,104.06 ; 14.02,86.28 BNC5.3 14.02,88.68 ; 65.99,32.94 BNC18.2 65.99,35.34 ; 43.13,130.48 BNC15.1 43.13,128.09 ; 82.6,124.24 BNC31.3 82.6,121.84 ; 89.41,5.09 J4.3 89.41,7.1 ; 14.02,56.97 BNC3.4 14.02,59.36 ; 43.13,70.9 BNC12.2 43.13,68.5 ; 36.88,56.97 BNC11.4 36.88,59.36 ; R9.1 28.66,3.8 ; R9.1 v1(26.04,2.97) ; R9.1 28.66,2.14 ; 14.02,104.06 BNC6.3 14.02,106.46 ; 20.27,148.26 BNC8.1 20.27,145.87 ; 14.02,15.16 BNC1.3 14.02,17.56 ; 82.6,139.62 BNC32.3 82.6,142.02 ; 82.6,35.34 BNC26.3 82.6,32.94 ; 43.13,106.46 BNC14.2 43.13,104.06 ; 28.66,0.23 28.66,1.07 ; 28.66,1.07 28.66,1.9 ; 28.66,1.07 v1(27.3,1.07) ; 65.99,53.12 BNC19.2 65.99,50.72 ; 20.27,53.12 BNC3.2 20.27,50.72 ; R13.1 39.28,1.9 ; R13.1 v1(40.64,1.07) ; R13.1 39.28,0.23 ; 20.27,35.34 BNC2.2 20.27,32.94 ; R14.1 v1(46.36,1.07) ; R14.1 45,0.23 ; R14.1 45,1.9 ; 65.99,86.28 BNC21.2 65.99,88.68 ; 36.88,106.46 BNC14.3 36.88,104.06 ; 66.55,7.1 J3.3 66.55,5.09 ; 43.13,94.92 BNC13.1 43.13,92.53 ; 36.88,50.72 BNC11.3 36.88,53.12 ; 82.6,56.97 BNC27.4 82.6,59.36 ; 82.6,74.75 BNC28.4 82.6,77.14 ; 14.02,148.26 BNC8.4 14.02,145.87 ; 88.85,32.94 BNC26.2 88.85,35.34 ; 20.27,15.16 BNC1.2 20.27,17.56 ; 59.74,110.31 BNC22.4 59.74,112.7 ; 88.85,128.09 BNC31.1 88.85,130.48 ; R28.1 74.38,7.61 ; R28.1 74.38,5.95 ; R28.1 v1(71.76,6.78) ; 36.88,23.8 BNC9.4 36.88,21.41 ; 43.13,77.14 BNC12.1 43.13,74.75 ; 36.88,32.94 BNC10.3 36.88,35.34 ; 65.99,17.56 BNC17.2 65.99,15.16 ; 59.74,139.62 BNC24.3 59.74,142.02 ; 65.99,68.5 BNC20.2 65.99,70.9 ; 28.66,4.04 R10.1 ; R10.1 28.66,5.71 ; R10.1 v1(26.04,4.88) ; 43.13,124.24 BNC15.2 43.13,121.84 ; 59.74,74.75 BNC20.4 59.74,77.14 ; 88.85,50.72 BNC27.2 88.85,53.12 ; 43.69,2.55 J2.4 43.69,4.56 ; 36.88,39.19 BNC10.4 36.88,41.58 ; 59.74,53.12 BNC19.3 59.74,50.72 ; 65.99,112.7 BNC22.1 65.99,110.31 ; 36.88,88.68 BNC13.3 36.88,86.28 ; R29.1 v1(86.36,1.07) ; R29.1 85,0.23 ; R29.1 85,1.9 ; 20.27,106.46 BNC6.2 20.27,104.06 ; 14.02,139.62 BNC8.3 14.02,142.02 ; 82.6,86.28 BNC29.3 82.6,88.68 ; 88.85,23.8 BNC25.1 88.85,21.41 ; 82.6,21.41 BNC25.4 82.6,23.8 ; 20.27,121.84 BNC7.2 20.27,124.24 ; R30.1 v1(92.08,1.07) ; R30.1 90.72,0.23 ; R30.1 90.72,1.9 ; 36.88,124.24 BNC15.3 36.88,121.84 ; 65.99,142.02 BNC24.2 65.99,139.62 ; 65.99,148.26 BNC24.1 65.99,145.87 ; 20.27,130.48 BNC7.1 20.27,128.09 ; 43.13,110.31 BNC14.1 43.13,112.7 ; 20.27,110.31 BNC6.1 20.27,112.7 ; 59.74,56.97 BNC19.4 59.74,59.36 ; 65.99,124.24 BNC23.2 65.99,121.84 ; 43.13,50.72 BNC11.2 43.13,53.12 ; 59.74,88.68 BNC21.3 59.74,86.28 ; 59.74,130.48 BNC23.4 59.74,128.09 ; 43.13,39.19 BNC10.1 43.13,41.58 ; 20.27,74.75 BNC4.1 20.27,77.14 ; 20.27,92.53 BNC5.1 20.27,94.92 ; 65.99,106.46 BNC22.2 65.99,104.06
N08480: length 152.8
  TOP w0.127: BNC1.5 17.02,19.48
  SIGNAL w0.112: BNC1.5 21.59,19.48 22.86,20.75 22.86,29.64 20.95,31.55 12.7,31.55 11.43,30.28 11.43,29.64 11.56,29.51 20.8,29.51 20.93,29.39 20.93,29.13 20.8,29.01 11.56,29.01 11.43,28.88 11.43,28.63 11.56,28.5 20.8,28.5 20.93,28.37 20.93,28.12 20.8,27.99 11.56,27.99 11.43,27.86 11.43,27.61 11.56,27.48 20.8,27.48 20.93,27.36 20.93,27.1 20.8,26.97 11.56,26.97 11.43,26.85 11.43,26.59 11.56,26.47 20.8,26.47 20.93,26.34 20.93,26.09 20.8,25.96 11.56,25.96 11.43,25.83 11.43,25.58 11.56,25.45 20.8,25.45 20.93,25.32 20.93,25.07 20.8,24.94 11.56,24.94 11.43,24.82 11.43,9.96 8.89,7.42 8.89,5.33 J1.12
  BOTTOM w0.145: J1.12 9.65,3.56 9.07,2.97 R1.2
N08489: length 156
  SIGNAL w0.112: J1.10 11.99,2.34 9.52,2.34 7.62,4.24 7.62,8.05 10.16,10.59 10.16,42.09 10.29,42.21 17.14,42.21 17.27,42.34 17.27,42.6 17.14,42.72 10.29,42.72 10.16,42.85 10.16,43.1 10.29,43.23 17.14,43.23 17.27,43.36 17.27,43.61 17.14,43.74 10.29,43.74 10.16,43.87 10.16,44.12 10.29,44.25 17.14,44.25 17.27,44.37 17.27,44.63 17.14,44.75 10.29,44.75 10.16,44.88 10.16,45.14 10.29,45.26 17.14,45.26 17.27,45.39 17.27,45.64 17.14,45.77 10.29,45.77 10.16,45.9 10.16,46.15 10.29,46.28 17.14,46.28 17.27,46.41 17.27,46.66 17.14,46.79 10.29,46.79 10.16,46.91 10.16,47.42 12.07,49.33 20.95,49.33 22.86,47.42 22.86,39.17 20.95,37.26 BNC2.5
  GND w0.127: BNC2.5 17.02,37.26
  BOTTOM w0.145: J1.10 10.72,1.07 R3.2
N08507: length 156
  SIGNAL w0.112: 17.02,55.04 BNC3.5 20.95,55.04 22.59,56.68 22.59,65.47 20.95,67.11 10.8,67.11 8.89,65.2 8.89,64.44 9.02,64.31 13.34,64.31 13.46,64.19 13.46,63.93 13.34,63.8 9.02,63.8 8.89,63.68 8.89,63.42 9.02,63.3 13.34,63.3 13.46,63.17 13.46,62.92 13.34,62.79 9.02,62.79 8.89,62.66 8.89,62.41 9.02,62.28 13.34,62.28 13.46,62.15 13.46,61.9 13.34,61.77 9.02,61.77 8.89,61.65 8.89,61.39 9.02,61.26 13.34,61.26 13.46,61.14 13.46,60.88 13.34,60.76 9.02,60.76 8.89,60.63 8.89,60.38 9.02,60.25 13.34,60.25 13.46,60.12 13.46,59.87 13.34,59.74 9.02,59.74 8.89,59.61 8.89,11.23 6.35,8.69 6.35,3.61 8.25,1.7 13.34,1.7 14.61,2.97 14.61,4.95 J1.7
  BOTTOM w0.145: R5.2 14.06,1.91 14.61,2.46 14.61,4.95 J1.7
N08519: length 157.5
  SIGNAL w0.112: 17.02,72.82 BNC4.5 20.32,72.82 22.86,75.36 22.86,82.98 20.95,84.89 9.52,84.89 7.62,82.98 7.62,82.22 7.75,82.09 9.96,82.09 10.08,81.97 10.08,81.71 9.96,81.58 7.75,81.58 7.62,81.46 7.62,81.2 7.75,81.08 9.96,81.08 10.08,80.95 10.08,80.7 9.96,80.57 7.75,80.57 7.62,80.44 7.62,80.19 7.75,80.06 9.96,80.06 10.08,79.93 10.08,79.68 9.96,79.55 7.75,79.55 7.62,79.43 7.62,79.17 7.75,79.04 9.96,79.04 10.08,78.92 10.08,78.66 9.96,78.54 7.75,78.54 7.62,78.41 7.62,78.16 7.75,78.03 9.96,78.03 10.08,77.9 10.08,77.65 9.96,77.52 7.75,77.52 7.62,77.39 7.62,11.86 5.08,9.32 5.08,2.97 7.62,0.43 15.16,0.43 J1.6
  BOTTOM w0.145: J1.6 18.36,3.56 19.68,4.88 19.68,6.78 20.95,8.05 R7.2
N08544: length 157.3
  SIGNAL w0.112: BNC5.5 9.53,90.6 7.62,92.51 7.62,95.68 7.75,95.81 9.52,95.81 9.65,95.94 9.65,96.19 9.52,96.32 7.75,96.32 7.62,96.44 7.62,96.7 7.75,96.82 9.52,96.82 9.65,96.95 9.65,97.21 9.52,97.33 7.75,97.33 7.62,97.46 7.62,97.71 7.75,97.84 9.52,97.84 9.65,97.97 9.65,98.22 9.52,98.35 7.75,98.35 7.62,98.48 7.62,98.73 7.75,98.86 9.52,98.86 9.65,98.98 9.65,99.24 9.52,99.36 7.75,99.36 7.62,99.49 7.62,99.75 7.75,99.87 9.52,99.87 9.65,100 9.65,100.25 9.52,100.38 7.75,100.38 7.62,100.51 7.62,100.76 9.52,102.67 15.88,102.67 24.13,94.41 24.13,15.67 20.32,11.86 16.43,11.86 J1.11
  BOTTOM w0.145: R2.2 9.45,4.88 J1.11
N08556: length 156.6
  SIGNAL w0.112: J1.9 17.7,10.59 20.95,10.59 25.4,15.04 25.4,99.11 25.27,99.24 21.84,99.24 21.72,99.36 21.72,99.62 21.84,99.75 25.27,99.75 25.4,99.87 25.4,100.13 25.27,100.25 21.84,100.25 21.72,100.38 21.72,100.63 21.84,100.76 25.27,100.76 25.4,100.89 25.4,101.14 25.27,101.27 21.84,101.27 21.72,101.4 21.72,101.65 21.84,101.78 25.27,101.78 25.4,101.9 25.4,102.16 25.27,102.29 21.84,102.29 21.72,102.41 21.72,102.67 21.84,102.79 25.27,102.79 25.4,102.92 25.4,103.17 25.27,103.3 21.84,103.3 21.72,103.43 21.72,103.68 21.84,103.81 25.27,103.81 25.4,103.94 25.4,104.57 21.59,108.38 BNC6.5 17.02,108.38
  BOTTOM w0.145: R4.2 9.52,6.78 10.16,7.42 11.89,7.42 J1.9
N08588: length 156.3
  SIGNAL w0.112: 17.02,126.16 BNC7.5 21.59,126.16 26.67,121.08 26.67,120.32 26.54,120.19 25.02,120.19 24.89,120.07 24.89,119.81 25.02,119.68 26.54,119.68 26.67,119.56 26.67,119.3 26.54,119.18 25.02,119.18 24.89,119.05 24.89,118.8 25.02,118.67 26.54,118.67 26.67,118.54 26.67,118.29 26.54,118.16 25.02,118.16 24.89,118.03 24.89,117.78 25.02,117.65 26.54,117.65 26.67,117.53 26.67,117.27 26.54,117.14 25.02,117.14 24.89,117.02 24.89,116.76 25.02,116.64 26.54,116.64 26.67,116.51 26.67,116.26 26.54,116.13 25.02,116.13 24.89,116 24.89,115.75 25.02,115.62 26.54,115.62 26.67,115.49 26.67,14.4 21.59,9.32 19.68,9.32 17.14,6.78 17.14,4.95 J1.8
  BOTTOM w0.145: R6.2 19.77,1.14 18.58,2.34 16.97,2.34 J1.8
N08600: length 156.6
  SIGNAL w0.112: 17.02,143.94 BNC8.5 21.59,143.94 27.94,137.59 27.94,13.77 22.22,8.05 20.24,8.05 J1.5
  BOTTOM w0.145: J1.5 18.29,8.56 19.68,9.96 R8.2
N13592: length 152.8
  TOP w0.127: BNC9.5 39.88,19.48
  SIGNAL w0.112: BNC9.5 44.45,19.48 45.72,20.75 45.72,29.64 43.82,31.55 35.56,31.55 34.29,30.28 34.29,29.64 34.42,29.51 43.66,29.51 43.79,29.39 43.79,29.13 43.66,29.01 34.42,29.01 34.29,28.88 34.29,28.63 34.42,28.5 43.66,28.5 43.79,28.37 43.79,28.12 43.66,27.99 34.42,27.99 34.29,27.86 34.29,27.61 34.42,27.48 43.66,27.48 43.79,27.36 43.79,27.1 43.66,26.97 34.42,26.97 34.29,26.85 34.29,26.59 34.42,26.47 43.66,26.47 43.79,26.34 43.79,26.09 43.66,25.96 34.42,25.96 34.29,25.83 34.29,25.58 34.42,25.45 43.66,25.45 43.79,25.32 43.79,25.07 43.66,24.94 34.42,24.94 34.29,24.82 34.29,9.96 31.75,7.42 31.75,5.33 J2.12
  BOTTOM w0.145: R9.2 31.93,2.97 32.51,3.56 J2.12
N13596: length 156
  SIGNAL w0.112: J2.10 34.85,2.34 32.39,2.34 30.48,4.24 30.48,8.05 33.02,10.59 33.02,42.09 33.15,42.21 40.01,42.21 40.13,42.34 40.13,42.6 40.01,42.72 33.15,42.72 33.02,42.85 33.02,43.1 33.15,43.23 40.01,43.23 40.13,43.36 40.13,43.61 40.01,43.74 33.15,43.74 33.02,43.87 33.02,44.12 33.15,44.25 40.01,44.25 40.13,44.37 40.13,44.63 40.01,44.75 33.15,44.75 33.02,44.88 33.02,45.14 33.15,45.26 40.01,45.26 40.13,45.39 40.13,45.64 40.01,45.77 33.15,45.77 33.02,45.9 33.02,46.15 33.15,46.28 40.01,46.28 40.13,46.41 40.13,46.66 40.01,46.79 33.15,46.79 33.02,46.91 33.02,47.42 34.93,49.33 43.82,49.33 45.72,47.42 45.72,39.17 43.82,37.26 BNC10.5
  GND w0.127: BNC10.5 39.88,37.26
  BOTTOM w0.145: J2.10 33.58,1.07 R11.2
N13604: length 156
  SIGNAL w0.112: 39.88,55.04 BNC11.5 43.81,55.04 45.45,56.68 45.45,65.47 43.82,67.11 33.66,67.11 31.75,65.2 31.75,64.44 31.88,64.31 36.2,64.31 36.32,64.19 36.32,63.93 36.2,63.8 31.88,63.8 31.75,63.68 31.75,63.42 31.88,63.3 36.2,63.3 36.32,63.17 36.32,62.92 36.2,62.79 31.88,62.79 31.75,62.66 31.75,62.41 31.88,62.28 36.2,62.28 36.32,62.15 36.32,61.9 36.2,61.77 31.88,61.77 31.75,61.65 31.75,61.39 31.88,61.26 36.2,61.26 36.32,61.14 36.32,60.88 36.2,60.76 31.88,60.76 31.75,60.63 31.75,60.38 31.88,60.25 36.2,60.25 36.32,60.12 36.32,59.87 36.2,59.74 31.88,59.74 31.75,59.61 31.75,11.23 29.21,8.69 29.21,3.61 31.11,1.7 36.2,1.7 37.47,2.97 37.47,4.95 J2.7
  BOTTOM w0.145: J2.7 37.47,4.95 37.47,2.46 36.92,1.91 R13.2
N13610: length 157.5
  SIGNAL w0.112: J2.6 38.02,0.43 30.48,0.43 27.94,2.97 27.94,9.32 30.48,11.86 30.48,77.39 30.61,77.52 32.82,77.52 32.94,77.65 32.94,77.9 32.82,78.03 30.61,78.03 30.48,78.16 30.48,78.41 30.61,78.54 32.82,78.54 32.94,78.66 32.94,78.92 32.82,79.04 30.61,79.04 30.48,79.17 30.48,79.43 30.61,79.55 32.82,79.55 32.94,79.68 32.94,79.93 32.82,80.06 30.61,80.06 30.48,80.19 30.48,80.44 30.61,80.57 32.82,80.57 32.94,80.7 32.94,80.95 32.82,81.08 30.61,81.08 30.48,81.2 30.48,81.46 30.61,81.58 32.82,81.58 32.94,81.71 32.94,81.97 32.82,82.09 30.61,82.09 30.48,82.22 30.48,82.98 32.39,84.89 43.82,84.89 45.72,82.98 45.72,75.36 43.18,72.82 BNC12.5 39.88,72.82
  BOTTOM w0.145: R15.2 43.82,8.05 42.55,6.78 42.55,4.88 41.22,3.56 J2.6
N13620: length 157.3
  SIGNAL w0.112: BNC13.5 32.39,90.6 30.48,92.51 30.48,95.68 30.61,95.81 32.39,95.81 32.51,95.94 32.51,96.19 32.39,96.32 30.61,96.32 30.48,96.44 30.48,96.7 30.61,96.82 32.39,96.82 32.51,96.95 32.51,97.21 32.39,97.33 30.61,97.33 30.48,97.46 30.48,97.71 30.61,97.84 32.39,97.84 32.51,97.97 32.51,98.22 32.39,98.35 30.61,98.35 30.48,98.48 30.48,98.73 30.61,98.86 32.39,98.86 32.51,98.98 32.51,99.24 32.39,99.36 30.61,99.36 30.48,99.49 30.48,99.75 30.61,99.87 32.39,99.87 32.51,100 32.51,100.25 32.39,100.38 30.61,100.38 30.48,100.51 30.48,100.76 32.39,102.67 38.74,102.67 46.99,94.41 46.99,15.67 43.18,11.86 39.29,11.86 J2.11
  BOTTOM w0.145: R10.2 32.31,4.88 J2.11
N13626: length 156.6
  SIGNAL w0.112: 39.88,108.38 BNC14.5 44.45,108.38 48.26,104.57 48.26,103.94 48.13,103.81 44.7,103.81 44.58,103.68 44.58,103.43 44.7,103.3 48.13,103.3 48.26,103.17 48.26,102.92 48.13,102.79 44.7,102.79 44.58,102.67 44.58,102.41 44.7,102.29 48.13,102.29 48.26,102.16 48.26,101.9 48.13,101.78 44.7,101.78 44.58,101.65 44.58,101.4 44.7,101.27 48.13,101.27 48.26,101.14 48.26,100.89 48.13,100.76 44.7,100.76 44.58,100.63 44.58,100.38 44.7,100.25 48.13,100.25 48.26,100.13 48.26,99.87 48.13,99.75 44.7,99.75 44.58,99.62 44.58,99.36 44.7,99.24 48.13,99.24 48.26,99.11 48.26,15.04 43.82,10.59 40.56,10.59 J2.9
  BOTTOM w0.145: J2.9 34.75,7.42 33.02,7.42 32.39,6.78 R12.2
N13636: length 156.3
  SIGNAL w0.112: 39.88,126.16 BNC15.5 44.45,126.16 49.53,121.08 49.53,120.32 49.4,120.19 47.88,120.19 47.75,120.07 47.75,119.81 47.88,119.68 49.4,119.68 49.53,119.56 49.53,119.3 49.4,119.18 47.88,119.18 47.75,119.05 47.75,118.8 47.88,118.67 49.4,118.67 49.53,118.54 49.53,118.29 49.4,118.16 47.88,118.16 47.75,118.03 47.75,117.78 47.88,117.65 49.4,117.65 49.53,117.53 49.53,117.27 49.4,117.14 47.88,117.14 47.75,117.02 47.75,116.76 47.88,116.64 49.4,116.64 49.53,116.51 49.53,116.26 49.4,116.13 47.88,116.13 47.75,116 47.75,115.75 47.88,115.62 49.4,115.62 49.53,115.49 49.53,14.4 44.45,9.32 42.55,9.32 40.01,6.78 40.01,4.95 J2.8
  BOTTOM w0.145: R14.2 42.63,1.14 41.44,2.34 39.83,2.34 J2.8
N13642: length 156.6
  SIGNAL w0.112: J2.5 43.1,8.05 45.09,8.05 50.8,13.77 50.8,137.59 44.45,143.94 BNC16.5 39.88,143.94
  BOTTOM w0.145: R16.2 42.55,9.96 41.15,8.56 J2.5
N14473: length 152.8
  TOP w0.127: BNC17.5 62.74,19.48
  SIGNAL w0.112: BNC17.5 67.31,19.48 68.58,20.75 68.58,29.64 66.67,31.55 58.42,31.55 57.15,30.28 57.15,29.64 57.28,29.51 66.52,29.51 66.65,29.39 66.65,29.13 66.52,29.01 57.28,29.01 57.15,28.88 57.15,28.63 57.28,28.5 66.52,28.5 66.65,28.37 66.65,28.12 66.52,27.99 57.28,27.99 57.15,27.86 57.15,27.61 57.28,27.48 66.52,27.48 66.65,27.36 66.65,27.1 66.52,26.97 57.28,26.97 57.15,26.85 57.15,26.59 57.28,26.47 66.52,26.47 66.65,26.34 66.65,26.09 66.52,25.96 57.28,25.96 57.15,25.83 57.15,25.58 57.28,25.45 66.52,25.45 66.65,25.32 66.65,25.07 66.52,24.94 57.28,24.94 57.15,24.82 57.15,9.96 54.61,7.42 54.61,5.33 J3.12
  BOTTOM w0.145: J3.12 55.37,3.56 54.79,2.97 R17.2
N14477: length 156
  SIGNAL w0.112: BNC18.5 66.67,37.26 68.58,39.17 68.58,47.42 66.67,49.33 57.79,49.33 55.88,47.42 55.88,46.91 56.01,46.79 62.87,46.79 62.99,46.66 62.99,46.41 62.87,46.28 56.01,46.28 55.88,46.15 55.88,45.9 56.01,45.77 62.87,45.77 62.99,45.64 62.99,45.39 62.87,45.26 56.01,45.26 55.88,45.14 55.88,44.88 56.01,44.75 62.87,44.75 62.99,44.63 62.99,44.37 62.87,44.25 56.01,44.25 55.88,44.12 55.88,43.87 56.01,43.74 62.87,43.74 62.99,43.61 62.99,43.36 62.87,43.23 56.01,43.23 55.88,43.1 55.88,42.85 56.01,42.72 62.87,42.72 62.99,42.6 62.99,42.34 62.87,42.21 56.01,42.21 55.88,42.09 55.88,10.59 53.34,8.05 53.34,4.24 55.25,2.34 57.71,2.34 J3.10
  GND w0.127: BNC18.5 62.74,37.26
  BOTTOM w0.145: R19.2 56.44,1.07 J3.10
N14485: length 156
  SIGNAL w0.112: J3.7 60.33,4.95 60.33,2.97 59.05,1.7 53.98,1.7 52.07,3.61 52.07,8.69 54.61,11.23 54.61,59.61 54.74,59.74 59.05,59.74 59.18,59.87 59.18,60.12 59.05,60.25 54.74,60.25 54.61,60.38 54.61,60.63 54.74,60.76 59.05,60.76 59.18,60.88 59.18,61.14 59.05,61.26 54.74,61.26 54.61,61.39 54.61,61.65 54.74,61.77 59.05,61.77 59.18,61.9 59.18,62.15 59.05,62.28 54.74,62.28 54.61,62.41 54.61,62.66 54.74,62.79 59.05,62.79 59.18,62.92 59.18,63.17 59.05,63.3 54.74,63.3 54.61,63.42 54.61,63.68 54.74,63.8 59.05,63.8 59.18,63.93 59.18,64.19 59.05,64.31 54.74,64.31 54.61,64.44 54.61,65.2 56.52,67.11 66.67,67.11 68.31,65.47 68.31,56.68 66.67,55.04 BNC19.5 62.74,55.04
  BOTTOM w0.145: R21.2 59.78,1.91 60.33,2.46 60.33,4.95 J3.7
N14491: length 157.5
  SIGNAL w0.112: J3.6 60.88,0.43 53.34,0.43 50.8,2.97 50.8,9.32 53.34,11.86 53.34,77.39 53.47,77.52 55.68,77.52 55.8,77.65 55.8,77.9 55.68,78.03 53.47,78.03 53.34,78.16 53.34,78.41 53.47,78.54 55.68,78.54 55.8,78.66 55.8,78.92 55.68,79.04 53.47,79.04 53.34,79.17 53.34,79.43 53.47,79.55 55.68,79.55 55.8,79.68 55.8,79.93 55.68,80.06 53.47,80.06 53.34,80.19 53.34,80.44 53.47,80.57 55.68,80.57 55.8,80.7 55.8,80.95 55.68,81.08 53.47,81.08 53.34,81.2 53.34,81.46 53.47,81.58 55.68,81.58 55.8,81.71 55.8,81.97 55.68,82.09 53.47,82.09 53.34,82.22 53.34,82.98 55.25,84.89 66.67,84.89 68.58,82.98 68.58,75.36 66.04,72.82 BNC20.5 62.74,72.82
  BOTTOM w0.145: J3.6 64.08,3.56 65.41,4.88 65.41,6.78 66.67,8.05 R23.2
N14501: length 157.3
  SIGNAL w0.112: BNC21.5 55.25,90.6 53.34,92.51 53.34,95.68 53.47,95.81 55.25,95.81 55.37,95.94 55.37,96.19 55.25,96.32 53.47,96.32 53.34,96.44 53.34,96.7 53.47,96.82 55.25,96.82 55.37,96.95 55.37,97.21 55.25,97.33 53.47,97.33 53.34,97.46 53.34,97.71 53.47,97.84 55.25,97.84 55.37,97.97 55.37,98.22 55.25,98.35 53.47,98.35 53.34,98.48 53.34,98.73 53.47,98.86 55.25,98.86 55.37,98.98 55.37,99.24 55.25,99.36 53.47,99.36 53.34,99.49 53.34,99.75 53.47,99.87 55.25,99.87 55.37,100 55.37,100.25 55.25,100.38 53.47,100.38 53.34,100.51 53.34,100.76 55.25,102.67 61.6,102.67 69.85,94.41 69.85,15.67 66.04,11.86 62.15,11.86 J3.11
  BOTTOM w0.145: R18.2 55.17,4.88 J3.11
N14507: length 156.6
  SIGNAL w0.112: J3.9 63.42,10.59 66.67,10.59 71.12,15.04 71.12,99.11 70.99,99.24 67.56,99.24 67.44,99.36 67.44,99.62 67.56,99.75 70.99,99.75 71.12,99.87 71.12,100.13 70.99,100.25 67.56,100.25 67.44,100.38 67.44,100.63 67.56,100.76 70.99,100.76 71.12,100.89 71.12,101.14 70.99,101.27 67.56,101.27 67.44,101.4 67.44,101.65 67.56,101.78 70.99,101.78 71.12,101.9 71.12,102.16 70.99,102.29 67.56,102.29 67.44,102.41 67.44,102.67 67.56,102.79 70.99,102.79 71.12,102.92 71.12,103.17 70.99,103.3 67.56,103.3 67.44,103.43 67.44,103.68 67.56,103.81 70.99,103.81 71.12,103.94 71.12,104.57 67.31,108.38 BNC22.5 62.74,108.38
  BOTTOM w0.145: J3.9 57.61,7.42 55.88,7.42 55.25,6.78 R20.2
N14517: length 156.3
  SIGNAL w0.112: J3.8 62.87,4.95 62.87,6.78 65.41,9.32 67.31,9.32 72.39,14.4 72.39,115.49 72.26,115.62 70.74,115.62 70.61,115.75 70.61,116 70.74,116.13 72.26,116.13 72.39,116.26 72.39,116.51 72.26,116.64 70.74,116.64 70.61,116.76 70.61,117.02 70.74,117.14 72.26,117.14 72.39,117.27 72.39,117.53 72.26,117.65 70.74,117.65 70.61,117.78 70.61,118.03 70.74,118.16 72.26,118.16 72.39,118.29 72.39,118.54 72.26,118.67 70.74,118.67 70.61,118.8 70.61,119.05 70.74,119.18 72.26,119.18 72.39,119.3 72.39,119.56 72.26,119.68 70.74,119.68 70.61,119.81 70.61,120.07 70.74,120.19 72.26,120.19 72.39,120.32 72.39,121.08 67.31,126.16 BNC23.5 62.74,126.16
  BOTTOM w0.145: R22.2 65.49,1.14 64.3,2.34 62.69,2.34 J3.8
N14523: length 156.6
  SIGNAL w0.112: J3.5 65.96,8.05 67.95,8.05 73.66,13.77 73.66,137.59 67.31,143.94 BNC24.5 62.74,143.94
  BOTTOM w0.145: R24.2 65.41,9.96 64.01,8.56 J3.5
N15354: length 152.8
  TOP w0.127: BNC25.5 85.6,19.48
  SIGNAL w0.112: BNC25.5 90.17,19.48 91.44,20.75 91.44,29.64 89.53,31.55 81.28,31.55 80.01,30.28 80.01,29.64 80.14,29.51 89.38,29.51 89.51,29.39 89.51,29.13 89.38,29.01 80.14,29.01 80.01,28.88 80.01,28.63 80.14,28.5 89.38,28.5 89.51,28.37 89.51,28.12 89.38,27.99 80.14,27.99 80.01,27.86 80.01,27.61 80.14,27.48 89.38,27.48 89.51,27.36 89.51,27.1 89.38,26.97 80.14,26.97 80.01,26.85 80.01,26.59 80.14,26.47 89.38,26.47 89.51,26.34 89.51,26.09 89.38,25.96 80.14,25.96 80.01,25.83 80.01,25.58 80.14,25.45 89.38,25.45 89.51,25.32 89.51,25.07 89.38,24.94 80.14,24.94 80.01,24.82 80.01,9.96 77.47,7.42 77.47,5.33 J4.12
  BOTTOM w0.145: R25.2 77.65,2.97 78.23,3.56 J4.12
N15358: length 156
  SIGNAL w0.112: BNC26.5 89.53,37.26 91.44,39.17 91.44,47.42 89.53,49.33 80.64,49.33 78.74,47.42 78.74,46.91 78.87,46.79 85.73,46.79 85.85,46.66 85.85,46.41 85.73,46.28 78.87,46.28 78.74,46.15 78.74,45.9 78.87,45.77 85.73,45.77 85.85,45.64 85.85,45.39 85.73,45.26 78.87,45.26 78.74,45.14 78.74,44.88 78.87,44.75 85.73,44.75 85.85,44.63 85.85,44.37 85.73,44.25 78.87,44.25 78.74,44.12 78.74,43.87 78.87,43.74 85.73,43.74 85.85,43.61 85.85,43.36 85.73,43.23 78.87,43.23 78.74,43.1 78.74,42.85 78.87,42.72 85.73,42.72 85.85,42.6 85.85,42.34 85.73,42.21 78.87,42.21 78.74,42.09 78.74,10.59 76.2,8.05 76.2,4.24 78.11,2.34 80.57,2.34 J4.10
  GND w0.127: BNC26.5 85.6,37.26
  BOTTOM w0.145: R27.2 79.3,1.07 J4.10
N15366: length 156
  SIGNAL w0.112: J4.7 83.19,4.95 83.19,2.97 81.92,1.7 76.84,1.7 74.93,3.61 74.93,8.69 77.47,11.23 77.47,59.61 77.6,59.74 81.92,59.74 82.04,59.87 82.04,60.12 81.92,60.25 77.6,60.25 77.47,60.38 77.47,60.63 77.6,60.76 81.92,60.76 82.04,60.88 82.04,61.14 81.92,61.26 77.6,61.26 77.47,61.39 77.47,61.65 77.6,61.77 81.92,61.77 82.04,61.9 82.04,62.15 81.92,62.28 77.6,62.28 77.47,62.41 77.47,62.66 77.6,62.79 81.92,62.79 82.04,62.92 82.04,63.17 81.92,63.3 77.6,63.3 77.47,63.42 77.47,63.68 77.6,63.8 81.92,63.8 82.04,63.93 82.04,64.19 81.92,64.31 77.6,64.31 77.47,64.44 77.47,65.2 79.38,67.11 89.53,67.11 91.17,65.47 91.17,56.68 89.53,55.04 BNC27.5 85.6,55.04
  BOTTOM w0.145: R29.2 82.64,1.91 83.19,2.46 83.19,4.95 J4.7
N15372: length 157.5
  SIGNAL w0.112: J4.6 83.74,0.43 76.2,0.43 73.66,2.97 73.66,9.32 76.2,11.86 76.2,77.39 76.33,77.52 78.54,77.52 78.66,77.65 78.66,77.9 78.54,78.03 76.33,78.03 76.2,78.16 76.2,78.41 76.33,78.54 78.54,78.54 78.66,78.66 78.66,78.92 78.54,79.04 76.33,79.04 76.2,79.17 76.2,79.43 76.33,79.55 78.54,79.55 78.66,79.68 78.66,79.93 78.54,80.06 76.33,80.06 76.2,80.19 76.2,80.44 76.33,80.57 78.54,80.57 78.66,80.7 78.66,80.95 78.54,81.08 76.33,81.08 76.2,81.2 76.2,81.46 76.33,81.58 78.54,81.58 78.66,81.71 78.66,81.97 78.54,82.09 76.33,82.09 76.2,82.22 76.2,82.98 78.11,84.89 89.53,84.89 91.44,82.98 91.44,75.36 88.9,72.82 BNC28.5 85.6,72.82
  BOTTOM w0.145: R31.2 89.53,8.05 88.27,6.78 88.27,4.88 86.94,3.56 J4.6
N15382: length 157.3
  SIGNAL w0.112: J4.11 85.01,11.86 88.9,11.86 92.71,15.67 92.71,94.41 84.46,102.67 78.11,102.67 76.2,100.76 76.2,100.51 76.33,100.38 78.11,100.38 78.23,100.25 78.23,100 78.11,99.87 76.33,99.87 76.2,99.75 76.2,99.49 76.33,99.36 78.11,99.36 78.23,99.24 78.23,98.98 78.11,98.86 76.33,98.86 76.2,98.73 76.2,98.48 76.33,98.35 78.11,98.35 78.23,98.22 78.23,97.97 78.11,97.84 76.33,97.84 76.2,97.71 76.2,97.46 76.33,97.33 78.11,97.33 78.23,97.21 78.23,96.95 78.11,96.82 76.33,96.82 76.2,96.7 76.2,96.44 76.33,96.32 78.11,96.32 78.23,96.19 78.23,95.94 78.11,95.81 76.33,95.81 76.2,95.68 76.2,92.51 78.11,90.6 BNC29.5
  BOTTOM w0.145: R26.2 78.03,4.88 J4.11
N15388: length 156.6
  SIGNAL w0.112: J4.9 86.28,10.59 89.53,10.59 93.98,15.04 93.98,99.11 93.85,99.24 90.42,99.24 90.3,99.36 90.3,99.62 90.42,99.75 93.85,99.75 93.98,99.87 93.98,100.13 93.85,100.25 90.42,100.25 90.3,100.38 90.3,100.63 90.42,100.76 93.85,100.76 93.98,100.89 93.98,101.14 93.85,101.27 90.42,101.27 90.3,101.4 90.3,101.65 90.42,101.78 93.85,101.78 93.98,101.9 93.98,102.16 93.85,102.29 90.42,102.29 90.3,102.41 90.3,102.67 90.42,102.79 93.85,102.79 93.98,102.92 93.98,103.17 93.85,103.3 90.42,103.3 90.3,103.43 90.3,103.68 90.42,103.81 93.85,103.81 93.98,103.94 93.98,104.57 90.17,108.38 BNC30.5 85.6,108.38
  BOTTOM w0.145: R28.2 78.11,6.78 78.74,7.42 80.47,7.42 J4.9
N15398: length 156.3
  SIGNAL w0.112: J4.8 85.73,4.95 85.73,6.78 88.27,9.32 90.17,9.32 95.25,14.4 95.25,115.49 95.12,115.62 93.6,115.62 93.47,115.75 93.47,116 93.6,116.13 95.12,116.13 95.25,116.26 95.25,116.51 95.12,116.64 93.6,116.64 93.47,116.76 93.47,117.02 93.6,117.14 95.12,117.14 95.25,117.27 95.25,117.53 95.12,117.65 93.6,117.65 93.47,117.78 93.47,118.03 93.6,118.16 95.12,118.16 95.25,118.29 95.25,118.54 95.12,118.67 93.6,118.67 93.47,118.8 93.47,119.05 93.6,119.18 95.12,119.18 95.25,119.3 95.25,119.56 95.12,119.68 93.6,119.68 93.47,119.81 93.47,120.07 93.6,120.19 95.12,120.19 95.25,120.32 95.25,121.08 90.17,126.16 BNC31.5 85.6,126.16
  BOTTOM w0.145: J4.8 85.55,2.34 87.16,2.34 88.35,1.14 R30.2
N15404: length 156.6
  SIGNAL w0.112: J4.5 88.82,8.05 90.81,8.05 96.52,13.77 96.52,137.59 90.17,143.94 BNC32.5 85.6,143.94
  BOTTOM w0.145: R32.2 88.27,9.96 86.87,8.56 J4.5

## Copper pours and planes (outline as drawn; the poured copper is in the pictures)
GND on TOP, BOTTOM, SIGNAL, GND: -2.66,-0.33 -2.66,156.13 105.53,156.13 105.53,-0.33

## Text on the board
Ref Des/Silkscreen Top: JA3 | JA4 | JA2 | JA1 | JA7 | JA8 | JB3 | JB4 | JB2 | JB1 | JA10 | JA9 | JB7 | JB8 | JC3 | JC4 | JC2 | JC1 | JB10 | JB9 | JC7 | JC8 | JD3 | JD4 | JD2 | JD1 | JC10 | JC9 | JD7 | JD8 | JD10 | JD9 | QuIQCL PMOD2BNC v1_0
